# Altium PCB RockRTK.PcbDoc (part 5 of 8)
Units mm, origin at the board's own origin, x right, y up, seen from the top; angles counter-clockwise.
Board outline 128 x 72 mm, 6 copper layers (Top Layer, MidLayer1GND, MidLayer2SIG, MidLayer3PWR, MidLayer4GND, Bottom Layer), stack 1.538 mm thick; 400 components, 307 nets, 1795 pads, 1243 vias.
Unrouted connection lines stored in the file: 522.
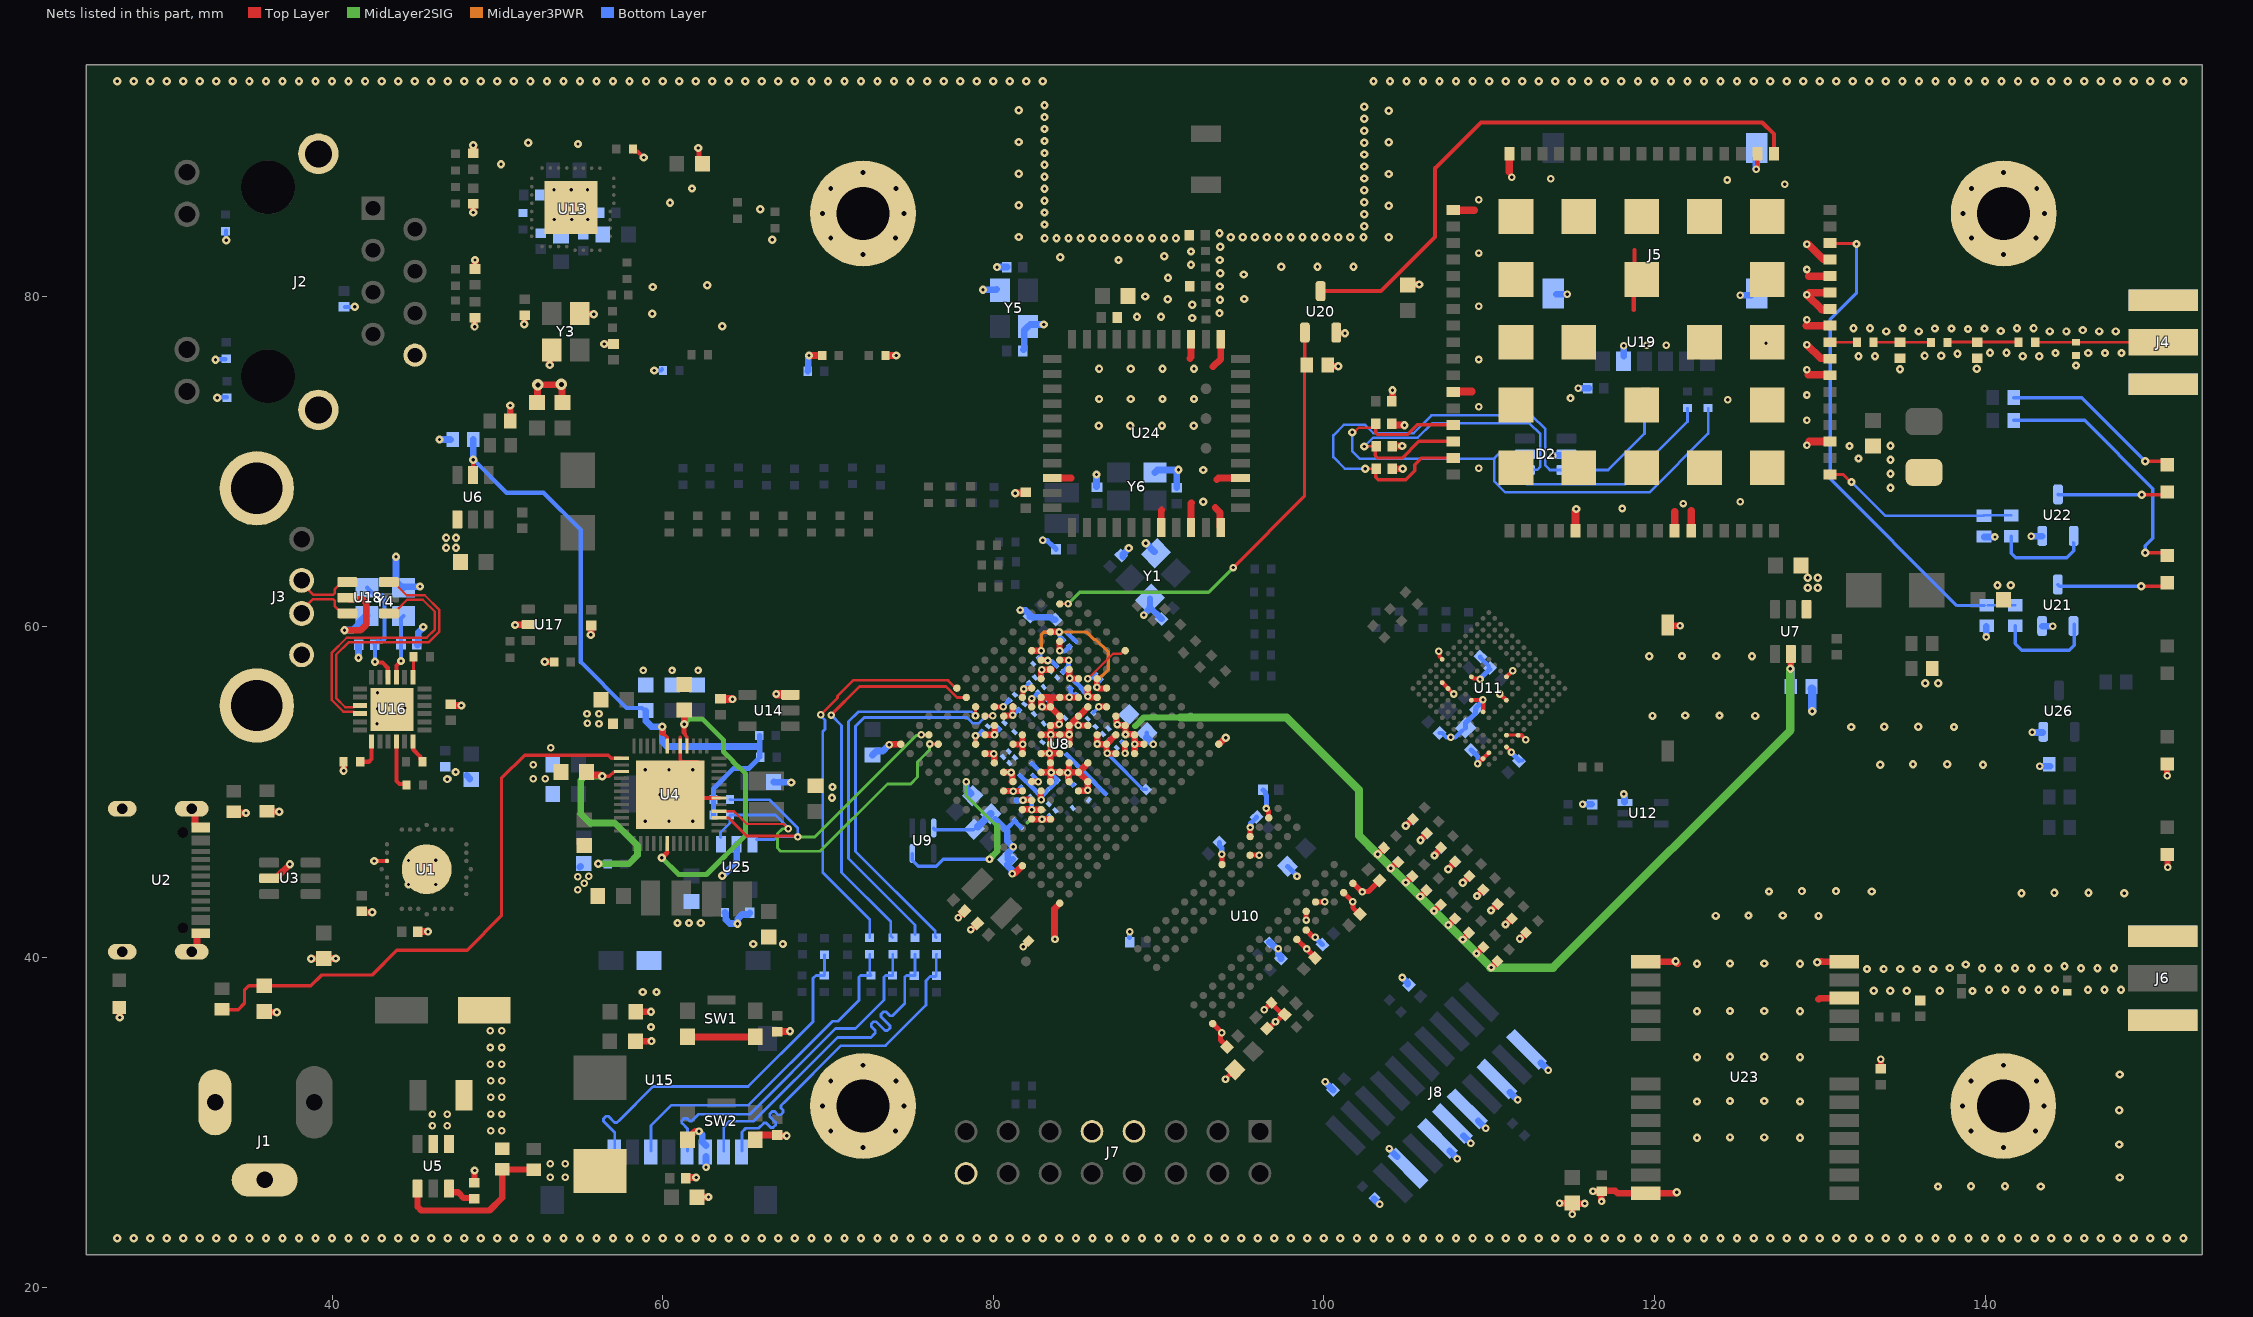
[diagram p8: the nets of this part, all layers, seen from the top]

## Via types
v1: diameter 0.5, hole 0.2, Top Layer to Bottom Layer, tented both sides, 532 vias
v2: diameter 0.457, hole 0.203, Top Layer to Bottom Layer, tented both sides, 414 vias
v3: diameter 0.5, hole 0.2, Top Layer to Bottom Layer, 233 vias
v4: diameter 0.7, hole 0.3, Top Layer to Bottom Layer, 32 vias
v5: diameter 0.457, hole 0.2, Top Layer to Bottom Layer, tented both sides, 30 vias
v6: diameter 0.7, hole 0.3, Top Layer to Bottom Layer, tented both sides, 2 vias

## Nets (pads, with @x,y where several pads share a name; then routed paths per layer and width w, separated by ;. In a path a pad name is that pad's centre, name@x,y a point inside that pad or via, vN(x,y) a via of type N, cw(c..) or ccw(c..) an arc to the next point about the centre after c; other vN are vias at no path point) (continued)
GND: C1.2 C2.2 C3.2 C4.2 C5.2 C6.2 C7.2 C8.2 C9.2 C10.2 C11.2 C12.2 C13.2 C14.2 C15.2 C16.2 C17.2 C18.2 C19.2 C20.2 C21.2 C22.2 C23.2 C25.2 C26.2 C27.2 C29.2 C30.2 C31.2 C33.2 C34.2 C35.2 C36.2 C37.2 C38.2 C39.2 C40.2 C41.2 C42.2 C43.2 C44.2 C45.2 C46.2 C47.2 C48.2 C49.2 C50.2 C51.2 C52.2 C53.2 C54.2 C55.2 C56.2 C57.2 C58.2 C59.2 C60.2 C61.2 C62.2 C63.2 C64.2 C65.2 C66.2 C67.2 C68.2 C69.2 C70.2 C71.2 C72.2 C73.2 C74.2 C75.2 C76.2 C77.2 C78.2 C79.2 C80.2 C81.2 C82.2 C83.2 C84.2 C85.2 C86.1 C87.1 C88.1 C89.1 C90.2 C91.2 C92.2 C93.2 C94.2 C95.2 C96.2 C97.2 C98.2 C99.2 C100.2 C101.2 C102.2 C103.2 C104.2 C105.2 C106.2 C107.2 C108.2 C109.2 C110.2 C111.2 C112.2 C113.2 C114.2 C115.2 C116.2 C117.2 C118.2 C119.2 C120.2 C121.2 C122.2 C123.2 C124.2 C125.1 C126.1 C127.2 C128.2 C129.2 C130.2 C131.2 C132.2 C133.2 C134.1 C135.1 C136.2 C137.2 C138.2 C139.2 C140.2 C141.2 C142.2 C143.2 C144.2 C145.2 C146.2 C147.2 C148.2 C149.2 C150.1 C151.1 C152.2 C153.2 C154.2 C155.2 C156.1 C157.2 C158.2 C159.2 C160.2 C161.2 C162.2 C163.2 C164.2 C165.2 D1.2 D2.2 D3.2 J1.2 J1.3 J2.8 J2.15 J2.16 J3.4 J3.5 J3.6 J4.G1 J4.G2 J4.G3 J4.G4 J5.C5 J5.S1 J5.S2 J5.S3 J6.G1 J6.G2 J6.G3 J6.G4 J7.07 J7.09 J7.16 J8.04 J8.08 J8.10 J8.12 J8.16 J8.20 LED1.2 LED4.2 LED5.2 MNH1.1 MNH2.1 MNH3.1 MNH4.1 R1.1 R2.1 R5.1 R6.1 R8.1 R10.1 R11.1 R15.1 R33.1 R34.1 R35.1 R36.1 R37.1 R38.1 R39.1 R40.1 R41.1 R42.1 R43.1 R44.1 R45.1 R46.1 R47.1 R48.1 R49.1 R51.2 R68.1 R69.1 R70.1 R76.1 R77.1 R78.1 R79.1 R80.1 R81.1 R92.2 R93.1 R100.2 R103.2 R104.1 R119.2 R120.1 R165.2 R168.1 SW1.3 SW1.4 SW2.3 SW2.4 SW3.2 U1.3 U1.29 U2.A1/B12 U2.B1/A12 U2.SH1 U2.SH2 U2.SH3 U2.SH4 U3.2 U4.30 U4.41 U4.49 U5.1 U6.1 U7.1 U8.A1 U8.A5 U8.A18 U8.E8 U8.F8 U8.G8 U8.G9 U8.G11 U8.G12 U8.H6 U8.H7 U8.H8 U8.H9 U8.H10 U8.H12 U8.J6 U8.J7 U8.J8 U8.J9 U8.J10 U8.J11 U8.K7 U8.K9 U8.K10 U8.K11 U8.L10 U8.L11 U8.L12 U8.L13 U8.M6 U8.M7 U8.M8 U8.M9 U8.M10 U8.M12 U8.M14 U8.N7 U8.N10 U8.N11 U8.N14 U8.V1 U8.V11 U9.3 U10.A9 U10.B1 U10.B9 U10.D1 U10.D8 U10.E2 U10.E8 U10.F9 U10.G1 U10.G9 U10.T9 U11.A6 U11.C4 U11.D4 U11.E7 U11.G5 U11.H10 U11.J5 U11.K8 U11.N1 U11.N2 U11.N5 U11.P4 U11.P6 U12.3 U13.33 U14.3 U15.6 U15.DS U16.25 U17.2 U18.2 U19.2 U19.17 U19.18 U19.29 U19.39 U19.45 U19.46 U19.54 U19.58 U19.59 U19.61 U19.62 U19.63 U19.64 U19.65 U19.69 U19.70 U19.71 U19.72 U19.73 U19.74 U19.75 U19.76 U19.77 U19.78 U19.79 U19.80 U19.81 U19.82 U19.83 U19.84 U19.85 U19.86 U19.87 U19.88 U20.2 U21.2 U22.2 U23.10 U23.12 U23.13 U23.24 U24.1 U24.3 U24.20 U24.29 U24.31 U24.33 U24.36 U25.2 U26.2 Y1.2 Y1.4 Y3.2 Y3.4 Y4.2 Y4.4 Y5.2 Y5.4 Y6.2 | length 248.5
  Top Layer w0.152: v2@85.8,57 85.89,57 87.259,58.368 87.73,58.368 87.905,58.544 U8.V11@87.986,58.544
  Top Layer w0.169: U10.T9@93.252,36.013 U10.T9@93.263,36.013 ; 93.621,35.655 93.825,35.451 v2(93.825,35.425) ; U10.E2@95.538,46.169 U10.E2@95.544,46.175
  Top Layer w0.178: U8.A5@81.734,45.533 U8.A5@81.763,45.533
  Top Layer w0.2: C124.2@63.55,55.6 C124.2@63.565,55.615 ; v5@64.21,55.615 v5(64.225,55.6)
  Top Layer w0.203: 61.057,53.305 61.057,51.953 61.176,51.834 U4.49@62.12,51.834 ; U11.N5@111.174,53.444 U11.P6@111.639,53.444
  Top Layer w0.254: v1(42.55,45.825) 43.175,45.825 ; R81.1@58.247,88.828 58.323,88.752 58.473,88.752 v1(58.85,88.375) ; U4.49@62.284,49.634 U4.30@63.42,49.634 ; U8.G11@81.757,52.328 U8.G11@81.763,52.321 ; v2(106.95,58.5) 106.989,58.461 106.989,58.203 107.157,58.035 U11.A6@107.157,58.025 ; U11.C4@107.164,56.611 U11.D4@107.525,56.25 ; U11.D4@107.511,56.257 107.511,56.247 107.825,55.933 v2@107.825,55.9 ; U11.G5@108.925,55.55 108.932,55.557 109.129,55.557 109.607,55.557 v2(109.625,55.575) 109.644,55.556 109.644,54.973 109.639,54.968 109.639,54.85 U11.J5@109.632,54.843 ; U11.E7@108.925,56.95 108.932,56.957 108.942,56.957 109.035,56.864 109.411,56.864 v2(109.45,56.825) ; v2@109.333,51.75 U11.N1@109.555,51.972 ; U11.N1@109.589,51.972 U11.N1@109.632,52.014 ; U11.N1@109.668,52.05 U11.N2@109.986,52.368 ; v2(110.65,55.925) 110.662,55.925 111.037,55.55 U11.K8@111.046,55.55 ; U11.P4@111.046,52.722 v2@111.318,52.45 ; U11.H10@111.046,56.964 111.055,56.964 111.416,57.325 v2(111.425,57.325) ; U11.P6@111.753,53.429 111.946,53.429 v2@112.15,53.225 ; 118.75,79.15 U19.85@118.75,80.23 ; U19.85@118.8,81.7 118.8,82.78 ; v2@126.075,87.65 126.075,87.655 126.225,87.805 U19.2@126.225,88.605
  Top Layer w0.305: v1@62.15,88.925 62.187,88.888 62.187,88.213 C127.2@62.4,88 ; U10.T9@93.263,36.013 93.621,35.655 ; v2@93.796,35.384 93.796,35.355 93.753,35.312 93.753,34.993 94.061,34.686 C92.2@94.061,34.536 ; v2(93.825,46.225) 93.833,46.217 93.833,45.639 U10.G1@93.852,45.62 ; v2@94.1,32.675 C91.2@94.627,33.202 ; U10.E2@95.525,46.181 v2@96.069,46.181 ; U10.D1@95.544,47.275 v2@95.544,47.819 ; v2(96.4,36.825) 96.775,37.2 R51.2@96.775,37.225 ; v2(96.525,49) 96.525,48.959 96.641,48.842 96.641,48.478 U10.B1@96.65,48.469 ; C93.2@96.625,35.7 96.664,35.7 97.064,36.1 97.116,36.1 97.396,36.38 C103.2@97.45,36.38 ; R51.2@96.821,37.221 C103.2@97.546,36.496 ; U10.G9@98.352,41.063 98.397,41.063 98.96,40.5 v2(98.975,40.5) 98.975,40.464 99.514,39.925 C100.2@99.514,39.914 ; v2(98.925,42.25) 98.928,42.253 98.928,42.737 U10.E8@98.966,42.775 ; U10.F9@98.928,41.648 99.346,41.229 99.446,41.229 v2(99.475,41.2) ; U10.D8@99.479,43.355 v2@100.045,43.355 ; U10.B9@101.202,43.913 101.202,43.898 v2(101.75,43.35) ; v2@101.75,43.325 101.753,43.322 101.753,43.001 C97.2@102.214,42.539 ; U10.A9@101.777,44.455 101.799,44.455 102.304,43.95 v2(102.325,43.95) 102.354,43.979 102.708,43.979 C95.2@103.364,44.636 ; U11.C4@107.157,56.611 U11.C4@107.164,56.611 ; U11.N1@109.555,51.972 U11.N1@109.589,51.972 ; U11.N1@109.65,52.05 U11.N1@109.668,52.05 ; v2@111.318,52.45 v2@111.325,52.45
  Top Layer w0.381: v2(77.89,42.391) C89.1@78.274,42.775 ; v2(78.65,41.675) 78.661,41.675 79.036,42.05 C88.1@79.049,42.05 ; U8.G12@81.19,52.875 v2(81.775,52.875) ; U8.G11@81.757,52.328 81.769,52.34 81.769,52.869 v2(81.775,52.875) ; U8.H12@81.763,53.453 81.769,53.447 81.769,52.881 v2(81.775,52.875) ; v2(81.815,40.641) R15.1@82.199,41.025 ; v2@81.819,49.519 U8.E8@82.269,49.519 ; v2@82.881,49.544 U8.F8@82.881,49.994 ; U8.M14@82.886,56.916 82.886,57.34 82.925,57.379 v2(82.925,57.4) 82.931,57.394 U8.N14@83.394,57.394 ; U8.G9@82.895,51.19 v2@83.46,51.19 ; U8.H10@82.895,52.321 82.908,52.335 83.364,52.335 83.379,52.35 v2(83.4,52.35) ; v2@82.906,55.249 U8.L13@82.906,55.616 ; U8.L13@82.925,55.65 83,55.725 83.4,55.725 ; U8.J11@82.97,53.479 82.957,53.466 82.908,53.466 U8.J11@82.895,53.453 v2@83.425,53.453 ; v2@83.009,55.112 U8.L12@83.434,55.112 ; 83.4,55.565 83.4,55.69 ; v2@83.425,53.5 83.459,53.466 84.013,53.466 U8.K10@84.026,53.453 84.037,53.464 84.589,53.464 v2(84.6,53.475) 84.596,53.479 84.596,54.014 U8.L10@84.592,54.018 ; 83.447,55.518 83.447,55.163 U8.L11@84.026,54.584 ; v2@83.45,51.225 83.472,51.203 U8.H8@84.013,51.203 ; U8.G8@83.46,50.624 83.474,50.637 83.474,51.128 83.5,51.154 v2(83.5,51.175) ; v2@83.46,51.215 U8.H9@83.46,51.756 U8.J10@83.46,52.887 83.468,52.894 v2@83.468,53.418 ; v2@83.474,53.501 83.474,54.005 U8.K11@83.46,54.018 83.474,54.032 83.911,54.032 83.979,54.1 v2(84,54.1) 84.015,54.115 84.015,54.49 U8.L11@84.025,54.5 ; v2@83.475,52.375 83.515,52.335 84.013,52.335 U8.J9@84.026,52.321 ; 83.475,55.7 83.477,55.702 84.013,55.702 U8.M12@84.026,55.715 ; U8.N14@83.556,57.406 U8.N14@83.56,57.41 ; U8.H8@83.975,51.2 83.985,51.19 84.579,51.19 85.162,51.19 85.448,51.476 85.459,51.476 U8.K7@85.717,51.733 ; U8.M12@84.007,55.715 U8.N11@85.157,55.715 ; U8.J9@84.025,52.298 U8.J9@84.027,52.3 ; v2@84.475,51.125 84.579,51.229 84.579,51.742 U8.J8@84.592,51.756 U8.J8@84.582,51.765 ; v2@84.475,51.172 84.579,51.068 84.579,50.637 U8.H7@84.592,50.624 ; U8.L10@84.582,54.018 84.61,54.018 84.69,54.098 84.702,54.098 84.879,54.275 ; U8.K9@84.592,52.887 84.605,52.9 84.605,53.38 v2@84.625,53.4 ; v2(85.15,54.025) 84.875,54.3 84.875,54.302 85.171,54.597 85.22,54.597 85.521,54.899 85.521,54.929 85.723,55.131 U8.N10@85.723,55.15 ; U8.H6@85.157,50.059 85.171,50.072 85.676,50.072 85.704,50.1 v2(85.725,50.1) 85.724,50.101 U8.J6@85.724,50.624 ; v2@85.157,54.018 U8.M9@85.723,54.018 ; U8.J7@85.171,51.178 U8.J6@85.711,50.637 ; U8.M8@86.289,53.453 86.294,53.447 86.294,52.906 86.313,52.887 U8.M7@86.854,52.887 ; U8.N7@87.417,53.45 U8.M7@86.854,52.887 ; U8.M6@87.42,52.321 86.949,52.321 86.921,52.35 v2(86.9,52.35) 86.9,52.371 86.854,52.416 U8.M7@86.854,52.887 ; U8.V1@93.687,52.907 v1@93.961,53.181 ; v1@105.064,48.044 R48.1@105.338,48.318 ; v1(105.85,47.075) 105.85,47.098 106.22,47.468 R44.1@106.238,47.468 ; v1(106.7,46.15) 106.7,46.182 107.084,46.566 107.084,46.597 R40.1@107.063,46.618 ; v1(107.525,45.325) 107.525,45.346 107.938,45.759 R36.1@107.938,45.768 ; v1@108.514,44.594 R39.1@108.788,44.868 ; v1@109.364,43.794 R35.1@109.638,44.068 ; v1@110.214,42.919 R38.1@110.488,43.193 ; v1@111.089,42.069 R34.1@111.363,42.343 ; v1@111.964,41.219 R37.1@112.238,41.493 ; v2@114.271,25.125 C148.2@114.824,25.125 ; v2@115.025,24.471 C148.2@115.025,25.024 ; C148.2@115.211,25.088 v2@115.763,25.088 ; v2@116.296,25.85 C147.2@116.849,25.85 ; v2@116.788,25.237 C147.2@116.788,25.789 ; SW3.2@120.836,60.038 120.848,60.05 v2(121.55,60.05) ; C146.2@133.712,33.261 v2@133.712,33.813 ; v2@151.013,50.987 LED4.2@151.013,51.539 ; v2@151.038,45.462 LED5.2@151.038,46.014
  Top Layer w0.406: v1(27.15,36.35) LED1.2@27.15,36.975 ; U2.SH2@31.559,40.327 31.583,40.327 31.834,40.578 31.834,41.355 31.956,41.477 U2.B1/A12@31.984,41.477 ; U2.SH1@31.875,48.9 31.858,48.9 31.709,48.751 31.709,47.974 31.806,47.877 U2.A1/B12@31.984,47.877 ; R1.1@34.175,48.725 v1(34.8,48.725) ; C18.2@36.025,36.675 v1(36.65,36.675) ; U3.2@36.141,44.75 36.233,44.842 36.667,44.842 v1(37.45,45.625) ; R2.1@36.175,48.8 v1(36.8,48.8) ; v1(38.75,39.9) C1.2@39.375,39.9 ; C1.2@39.6,39.925 v1(40.225,39.925) ; v1(40.7,51.275) R93.1@40.7,51.9 ; v1@40.725,59.775 41.712,59.775 42.075,60.138 42.075,61.42 41.837,61.658 41.017,61.658 U18.2@40.925,61.75 ; C3.2@41.8,42.725 v1(42.425,42.725) ; C2.2@45.175,41.55 v1(45.8,41.55) ; C133.2@47.272,55.223 v1@47.823,55.223 ; v1@48.548,85.052 C122.2@48.548,85.603 ; C121.2@48.552,88.573 v1@48.552,89.123 ; v1@48.623,78.152 C120.2@48.623,78.702 ; C119.2@48.652,81.622 v1@48.652,82.173 ; v1(50.775,73.375) 50.777,73.373 50.777,72.444 R8.1@50.779,72.442 ; v1(51.075,60.1) 51.085,60.11 51.862,60.11 U17.2@51.872,60.12 ; v1@51.623,78.303 C126.1@51.623,78.853 ; C30.2@52.397,73.557 52.423,73.583 52.423,74.598 52.462,74.637 53.862,74.637 v6(53.875,74.65) 53.911,74.614 53.911,73.592 C31.2@53.946,73.557 ; v1@52.877,57.877 R92.2@53.428,57.877 ; v1@53.172,75.827 Y3.4@53.172,76.378 ; Y3.2@55.273,78.898 v1@55.823,78.898 ; C132.2@55.648,60.053 55.661,60.039 55.661,59.511 v1(55.65,59.5) ; v1@56.477,77.103 C125.1@57.028,77.103 ; R81.1@58.2,88.9 58.247,88.853 R81.1@58.247,88.828 ; C26.2@58.45,36.725 58.475,36.7 v1(59.3,36.7) ; C27.2@58.575,34.925 v1(59.325,34.925) ; v5(60.569,57.348) v5@60.57,57.349 ; C17.2@61.3,56.5 C17.2@61.415,56.615 ; SW1.3@61.35,35 61.525,35.175 SW1.4@65.6,35.175 ; SW2.3@61.5,28.95 61.5,29 61.965,29.465 62.19,29.465 v2(62.2,29.475) ; C128.2@61.525,26.675 v1(62.025,26.675) ; v5@62.148,57.348 v5@62.147,57.349 ; C129.2@62.15,25.5 v1(62.775,25.5) ; U4.49@62.25,49.6 U4.49@62.284,49.634 ; SW2.4@65.6,28.95 65.6,29 65.847,29.247 66.622,29.247 C90.2@66.625,29.25 ; C90.2@66.875,29.2 v1(67.5,29.2) ; C23.2@67.025,35.5 67.035,35.51 67.685,35.51 v1(67.7,35.525) ; v1(68.85,76.4) R78.1@69.65,76.4 ; R76.1@73.475,76.4 v1(74.125,76.4) ; v2@73.675,52.85 73.704,52.879 74.401,52.879 U8.A18@74.409,52.887 ; v2(81.15,45.05) 81.16,45.06 81.278,45.06 81.743,45.525 U8.A5@81.743,45.533 ; v1@81.327,68.077 C154.2@81.877,68.077 ; U24.20@83.582,68.986 84.711,68.986 84.725,69 ; v2@83.7,41.1 83.7,42.933 84.026,43.259 U8.A1@84.026,43.27 ; U24.29@90.17,65.998 90.17,67.02 90.2,67.05 ; 91.9,76.225 91.97,76.295 U24.3@91.97,77.374 ; U24.31@91.97,65.998 91.97,67.47 92,67.5 ; 93.3,75.725 93.77,76.195 U24.1@93.77,77.374 ; 93.425,67.2 93.723,66.902 93.723,66.045 U24.33@93.77,65.998 ; 93.525,68.9 93.611,68.986 U24.36@94.958,68.986 ; R100.2@100.322,75.748 v1@100.873,75.748 ; U20.2@100.722,77.748 v1@101.273,77.748 ; C143.2@104.105,72.275 104.187,72.193 104.857,72.193 v1(104.875,72.175) ; C142.2@104.15,70.925 v1(104.75,70.925) ; C144.2@104.15,73.7 v1(104.15,74.3) ; C141.2@104.175,69.55 v1(104.775,69.55) ; C136.2@105.222,80.697 v1@105.773,80.697 ; C147.2@116.875,25.85 116.9,25.875 117.625,25.875 117.774,25.726 121.276,25.726 121.325,25.775 v1(121.35,25.775) ; U23.13@119.476,39.726 121.274,39.726 v1@121.4,39.6 ; 129.925,37.45 130.001,37.526 U23.10@131.476,37.526 ; v1@130.075,39.75 130.099,39.726 U23.12@131.476,39.726
  Top Layer w0.457: U19.29@107.87,74.225 108.95,74.225 ; U19.18@108.02,85.2 109.1,85.2 ; 111.225,87.525 U19.17@111.225,88.605 ; U19.39@115.225,65.945 v1@115.225,67.025 ; U19.45@121.225,65.87 121.225,66.95 ; U19.46@122.225,65.92 122.225,67 ; 129.2,78.2 U19.61@130.28,78.2 ; v2(129.225,77.05) 130.05,76.225 U19.59@130.355,76.225 ; v2(129.225,80.088) 130.138,79.175 U19.62@130.23,79.175 ; v2(129.225,83.125) 129.305,83.125 130.205,82.225 ; 129.3,75.225 U19.58@130.38,75.225 ; 129.325,81.2 U19.64@130.405,81.2 ; 129.375,71.2 U19.54@130.455,71.2 ; v2@129.375,80.2 U19.63@130.455,80.2
  Top Layer w0.5: C124.2@63.565,55.615 v5@64.21,55.615 ; v5@66.89,55.91 U14.3@67.535,55.91
  Bottom Layer w0.2: C52.2@83.273,50.127 C52.2@83.275,50.125 ; C165.2@100.561,31.961 C165.2@100.561,31.964
  Bottom Layer w0.203: U9.3@76.4,47.82 76.4,47.771 76.461,47.709 78.805,47.709 C40.2@78.823,47.727 ; C50.2@80.1,48.35 C50.2@80.125,48.35 ; C39.2@80.873,45.927 C39.2@80.873,46.348 ; v2@81.726,52.826 v2(81.775,52.875) v2@81.762,52.888 ; v2@82.866,57.325 v2@82.925,57.325 ; v2@82.9,57.4 v2(82.925,57.4) ; v2@82.975,49.45 83.001,49.476 v2@83.017,49.476 ; C79.2@85.009,59.076 C79.2@85.044,59.041 ; v2@86.925,52.325 86.925,52.305 87.184,52.046 87.184,52.026 89.057,50.154 R120.1@89.254,50.154
  Bottom Layer w0.254: v1@32.983,76.172 R69.1@33.547,76.172 ; v1@33.083,73.872 R70.1@33.647,73.872 ; v1@33.578,83.408 R68.1@33.578,83.972 ; C123.2@40.778,79.328 v1@41.342,79.328 ; v1(59.5,75.5) 59.902,75.5 59.953,75.551 R79.1@59.953,75.572 ; C111.2@106.989,53.561 107.164,53.561 107.425,53.3 107.95,53.3 C110.2@108.375,53.725 ; C105.2@109.204,54.996 C105.2@109.204,55.099 ; v2(109.45,56.825) v2@109.45,56.852 ; C109.2@109.464,58.189 109.464,58.137 110,57.602 C106.2@110,57.5 ; v2@109.575,55.5 109.586,55.489 v2@109.586,55.481 ; C106.2@109.998,57.4 C106.2@110.075,57.4 ; v2@111.35,52.364 v2(111.35,52.4) ; C108.2@111.814,51.9 C108.2@112,51.9
  Bottom Layer w0.279: 80.8,47.825 80.867,47.825 C83.2@81.316,48.274 ; C83.2@81.35,48.175 81.354,48.175 81.654,47.875 C84.2@81.675,47.875 ; C82.2@81.634,50.976 81.994,50.616 82.044,50.616 C65.2@82.059,50.601 82.059,50.591 82.55,50.1 C81.2@82.55,50.075 ; C43.2@82.359,51.701 82.8,51.26 C44.2@82.8,51.25 ; C81.2@82.643,49.974 v2@82.916,49.7 ; v2@82.926,49.743 C52.2@83.2,50.016 ; 83.476,50.268 83.75,50.541 ; v2@83.559,51.05 83.832,50.776 ; C61.2@84.437,52.263 C35.2@86.153,50.547 ; C67.2@84.555,59.541 C79.2@84.93,59.166 ; v2(84.6,55.725) 84.6,55.773 84.681,55.854 84.681,56.259 C78.2@84.666,56.274 ; v2@84.625,55.675 84.625,55.702 84.811,55.888 85.027,55.888 C77.2@85.041,55.874 ; C36.2@84.849,50.434 84.482,50.8 v2@84.482,51.168 ; v2(85.725,56.85) 85.759,56.884 85.903,56.884 86.128,57.109 C62.2@86.149,57.109 ; C35.2@86.145,50.539 C38.2@86.788,49.896 ; C70.2@89.298,53.277 C70.2@89.298,53.577 ; v2@84.481,51.169 v2@84.482,51.168
  Bottom Layer w0.305: v2@82.975,65.295 82.975,65.291 83.07,65.196 83.274,65.196 83.627,64.843 83.657,64.843 83.795,64.705 C157.2@83.795,64.675 ; v2(84,54.1) v2@84.029,54.071 ; v2@85.063,54.071 85.109,54.025 v2(85.15,54.025) ; v2@85.696,50.129 v2(85.725,50.1) ; v2(86.3,52.9) v2@86.3,52.941 ; C96.2@88.25,41.188 v2(88.25,41.55) ; C104.2@93.689,46.939 93.689,46.745 93.825,46.609 v2(93.825,46.225) ; v2@95.575,47.9 95.579,47.904 95.579,48.104 95.936,48.461 C98.2@95.936,48.489 ; C99.2@96.32,50.125 96.458,49.987 96.458,49.846 96.525,49.779 v2(96.525,49) ; C102.2@97.802,45.502 98.354,44.95 v2@98.375,44.95 ; v2(99.475,41.2) v2(99.475,41.2) 99.909,40.764 C101.2@99.911,40.764 ; C110.2@108.573,53.877 108.573,54.166 109.183,54.776 109.183,54.975 C105.2@109.204,54.996 ; C107.2@108.911,52.536 109.325,52.121 v2@109.325,51.8 ; C105.2@109.204,55.099 v2@109.586,55.481 ; v2@109.45,56.852 C106.2@109.998,57.4 ; v2@111.35,52.364 C108.2@111.814,51.9
  Bottom Layer w0.381: C85.2@81.412,49.477 81.42,49.485 81.79,49.485 v2@81.8,49.475 ; v2(89.1,60.7) 89.1,60.719 89.483,61.102 Y1.2@89.483,61.681 ; Y1.2@89.45,61.196 C86.1@90.186,60.461 ; v1(104.96,47.949) 104.98,47.949 105.345,48.314 105.361,48.314 R43.1@105.4,48.275 ; v1@105.9,47.1 105.883,47.117 105.883,47.12 106.246,47.484 R42.1@106.246,47.496 ; v1(106.7,46.15) 106.7,46.182 107.096,46.579 R47.1@107.096,46.621 ; v1(107.525,45.325) 107.525,45.357 107.875,45.707 R46.1@107.875,45.775 ; v1@108.475,44.575 R45.1@108.821,44.921 ; v1@109.25,43.725 109.293,43.725 109.64,44.071 R41.1@109.646,44.071 ; v1@110.15,42.875 110.496,43.221 R33.1@110.521,43.221
  Bottom Layer w0.4: v2@100.05,32.475 C165.2@100.561,31.964
  Bottom Layer w0.406: v1(40.75,59.775) 40.768,59.793 41.268,59.793 41.628,60.153 41.628,60.253 42.025,60.65 Y4.2@42.125,60.65 ; v1(41.6,58.125) C135.1@41.6,58.93 ; v1(43.875,64.225) 43.875,62.747 44.272,62.35 Y4.4@44.325,62.35 44.382,62.407 45.307,62.407 v1(45.325,62.425) ; C134.1@45.168,58.882 45.217,58.931 45.217,59.641 45.525,59.95 v1(45.525,59.975) ; v1(46.5,71.325) 47.15,71.325 R6.1@47.175,71.3 ; v1@46.975,50.778 v1(46.975,50.775) 46.993,50.793 v1@47.043,50.793 ; v1@47.45,51.2 v1@47.5,51.2 ; C131.2@48.153,50.997 48.33,50.82 C131.2@48.33,50.775 ; C7.2@54.985,45.454 C7.2@55.025,45.494 ; v2(62.2,29.475) 62.2,29.461 62.403,29.258 62.403,28.822 62.619,28.606 U15.6@62.625,28.606 ; v2(62.625,27.3) U15.6@62.625,27.944 ; v1@63.7,45 64.475,45.775 U25.2@64.475,46.825 ; R119.2@63.775,42.7 63.822,42.653 63.822,42.281 64.06,42.043 64.518,42.043 v1@64.543,42.018 ; v1(64.525,42.025) 64.543,42.043 64.543,42.316 64.81,42.583 65.183,42.583 C160.2@65.27,42.67 ; C14.2@66.725,50.6 66.737,50.588 67.762,50.588 v1(67.775,50.575) ; R77.1@68.775,75.45 68.81,75.485 68.81,76.335 68.85,76.375 v1(68.85,76.4) ; C51.2@72.7,52.225 72.947,52.472 73.322,52.472 73.675,52.825 v2@73.7,52.825 ; v1(79.375,80.375) 80.18,80.375 Y5.4@80.215,80.41 ; C50.2@80.125,48.35 80.802,47.673 ; v1(80.225,81.75) C150.1@80.855,81.75 ; 80.85,47.6 80.85,47.025 v2(81.2,46.675) 81.19,46.665 81.19,46.593 80.873,46.276 C39.2@80.873,45.927 ; v2(81.15,45.05) 81.14,45.06 81.14,45.275 80.855,45.56 80.855,45.605 C39.2@81.175,45.925 ; v5(81.625,61) 81.635,60.99 81.958,60.99 C162.2@82.39,60.559 ; C151.1@81.825,76.75 81.83,76.75 81.872,76.792 81.872,77.922 Y5.2@82.1,78.15 ; C162.2@82.226,60.593 C162.2@82.205,60.615 82.327,60.615 82.372,60.57 83.484,60.57 83.636,60.418 C163.2@83.759,60.418 ; Y5.2@82.245,78.275 v1(83.05,78.275) ; C155.2@86.25,68.455 v1(86.25,69.2) ; C87.1@87.847,64.239 87.847,64.372 88.2,64.725 v1(88.2,64.75) ; v1(89.234,65.049) Y1.4@89.761,64.522 ; Y6.2@89.777,69.325 89.93,69.478 91.178,69.478 v1@91.2,69.5 ; C156.1@91.1,68.405 91.1,69.35 v1@91.2,69.45 ; R49.1@96.704,40.904 96.744,40.904 97.125,40.522 97.223,40.522 v2@97.233,40.512 ; v2@97.247,40.499 97.256,40.489 97.256,40.195 97.414,40.037 C94.2@97.414,39.914 ; R168.1@103.025,25.375 103.045,25.375 103.368,25.051 v2(103.382,25.051) ; v2(103.95,28.425) 103.95,28.411 104.433,27.928 J8.04@104.433,27.926 ; v2(104.75,38.775) 104.75,38.761 105.083,38.428 C164.2@105.083,38.376 ; J8.08@107.617,28.274 v2(108.073,27.819) ; J8.10@108.442,29.199 v2(108.898,28.744) ; J8.12@109.342,30.099 v2(109.798,29.644) ; J8.16@111.267,31.824 v2(111.723,31.369) ; J8.20@113.117,33.624 v2(113.573,33.169) ; v2(113.85,70.35) 113.86,70.36 114.921,70.36 D2.2@114.971,70.41 ; J5.S1@114.081,80.1 v2(114.725,80.1) ; v2(115.4,74.425) C145.2@116.044,74.425 ; v2(115.65,49.25) C112.2@116.194,49.25 ; v2(118.15,49.875) 118.15,49.861 118.185,49.827 118.185,49.396 U12.3@118.2,49.381 ; J5.C5@118.15,76.356 v2(118.15,77) ; v2(125.2,80.05) J5.S2@125.844,80.05 ; v2(126.15,87.675) J5.S3@126.15,88.319 ; R103.2@139.956,65.425 v2(140.6,65.425) ; v2(140.075,59.375) R104.1@140.075,60.019 ; v2(142.8,65.475) U22.2@143.444,65.475 ; v2(142.85,53.6) U26.2@143.494,53.6 ; v2(143.3,51.55) R165.2@143.944,51.55 ; U21.2@143.456,60.025 v2(144.1,60.025)
  Bottom Layer w0.457: C40.2@79.071,47.9 C50.2@79.848,48.677 ; C70.2@89.298,53.277 v5@89.65,52.925
  Bottom Layer w0.508: R10.1@129.525,56.25 129.55,56.225 v1(129.55,54.875)
  other v1: 137.155,26.125 143.375,26.125 139.145,26.15 141.21,26.15 148.15,26.68 148.125,28.67 122.58,29.075 128.8,29.075 124.57,29.1 126.635,29.1 148.125,30.735 122.58,31.275 128.8,31.275 124.57,31.3 126.635,31.3 148.15,32.9 122.58,33.95 128.8,33.95 124.57,33.975 126.635,33.975 59.3,35.775 122.58,36.725 128.8,36.725 124.57,36.75 126.635,36.75 58.8,37.9 59.625,37.9 133.263,37.97 134.263,37.97 135.263,37.97 137.263,37.97 139.24,37.96 140.238,38.026 141.238,38.026 142.238,38.026 143.238,38.026 144.238,38.026 146.226,38.026 147.226,38.026 148.226,38.026 132.864,39.282 133.864,39.282 134.864,39.282 135.864,39.282 136.864,39.282 137.862,39.349 139.816,39.338 140.816,39.338 141.816,39.338 142.816,39.338 143.816,39.338 145.804,39.338 146.804,39.338 147.804,39.338 144.81,39.448 138.84,39.555 122.58,39.6 128.8,39.6 124.57,39.625 126.635,39.625 129.855,39.7 121.28,39.75 65.475,40.8 67.275,40.8 111.86,41.124 110.985,41.974 60.9,42.075 61.6,42.075 62.3,42.075 123.705,42.5 129.925,42.5 125.695,42.525 127.76,42.525 110.11,42.824 109.26,43.699 142.205,43.875 148.425,43.875 144.195,43.9 146.26,43.9 126.93,43.975 133.15,43.975 128.92,44 130.985,44 44.625,44.4 46.275,44.4 108.41,44.499 63.6,44.925 44.625,45.85 46.275,45.875 58.95,48.225 60.387,48.225 61.825,48.225 70.25,49.65 59.85,49.825 70.275,50.3 47.475,51.2 58.95,51.35 60.387,51.35 61.825,51.35 133.655,51.65 139.875,51.65 135.645,51.675 137.71,51.675 94.065,53.276 131.905,53.925 138.125,53.925 133.895,53.95 135.96,53.95 42.725,54.125 119.88,54.6 126.1,54.6 121.87,54.625 123.935,54.625 42.75,55.025 44.4,55.075 47.825,55.225 42.75,56 136.375,56.575 137.175,56.575 52.875,57.875 119.68,58.2 125.9,58.2 121.67,58.225 123.735,58.225 129.275,62.35 129.875,62.35 140.75,62.5 141.55,62.5 129.275,62.95 129.875,62.95 46.9,64.775 47.5,64.775 46.9,65.375 47.5,65.375 115.275,67.11 92.7,67.56 81.325,68.075 134.275,68.4 134.275,69.25 92.7,69.475 91.211,69.496 134.275,70.1 132.35,70.175 131.8,70.925 134.275,70.95 86.38,72.15 88.295,72.15 90.21,72.15 92.125,72.15 86.405,73.775 88.32,73.775 90.235,73.775 92.15,73.775 114.925,73.825 33.055,73.845 134.85,75.575 86.405,75.6 88.32,75.6 90.235,75.6 92.15,75.6 139.5,75.6 100.875,75.75 145.5,75.8 53.175,75.825 32.955,76.145 132.345,76.364 133.345,76.364 142.281,76.364 143.281,76.364 136.344,76.385 137.344,76.385 138.338,76.5 144.263,76.549 146.251,76.549 147.251,76.549 148.251,76.549 140.302,76.569 141.302,76.569 56.475,77.1 101.275,77.75 134.022,77.861 135.982,77.861 143.921,77.861 144.921,77.861 146.915,77.861 147.915,77.861 140.952,77.881 145.918,77.938 138.965,78.002 136.966,78.041 137.966,78.041 139.964,78.037 132.04,78.046 133.04,78.046 135.002,78.061 141.938,78.046 142.938,78.046 48.625,78.15 63.6,78.175 51.625,78.3 92.034,78.673 88.7,78.75 90.15,78.75 55.825,78.9 59.375,78.925 93.688,78.967 41.37,79.355 92.034,79.478 93.716,79.771 90.55,79.8 95.178,79.825 89.2,79.975 59.4,80.55 93.711,80.576 62.7,80.65 105.775,80.7 90.575,81.1 95.153,81.3 93.731,81.38 97.425,81.775 99.612,81.775 101.8,81.775 91.964,81.888 48.65,82.175 87.578,82.175 93.7,82.184 84.053,82.35 90.353,82.4 91.964,82.693 93.727,82.989 33.605,83.38 66.625,83.4 83.107,83.5 83.829,83.5 84.551,83.5 85.274,83.5 85.996,83.5 86.718,83.5 87.44,83.5 88.162,83.5 88.884,83.5 89.606,83.5 90.328,83.5 91.05,83.5 94.375,83.55 95.097,83.55 95.819,83.55 96.541,83.55 97.263,83.55 97.985,83.55 98.707,83.55 99.429,83.55 100.151,83.55 100.874,83.55 101.596,83.55 102.4,83.55 103.925,83.55 81.55,83.575 93.686,83.793 102.45,84.225 83.1,84.325 53.45,84.625 54.5,84.625 55.475,84.625 102.45,84.947 48.55,85.05 83.1,85.047 65.9,85.25 103.925,85.465 81.55,85.49 60.45,85.65 102.45,85.669 83.1,85.769 102.45,86.391 53.425,86.425 54.475,86.425 55.45,86.425 83.1,86.491 61.775,86.5 102.45,87.113 83.1,87.213 103.925,87.38 81.55,87.405 102.45,87.835 83.1,87.935 50.225,87.975 102.45,88.557 83.1,88.657 62.15,88.95 48.55,89.125 54.875,89.2 51.875,89.275 102.45,89.279 103.925,89.295 81.55,89.32 83.1,89.379 102.45,90.001 83.1,90.101 102.45,90.724 83.1,90.824 103.925,91.21 81.55,91.235 102.45,91.446 83.1,91.546
  other v2: 115.037,24.459 115.775,25.1 114.259,25.113 116.8,25.225 116.284,25.838 49.592,29.5 50.275,29.5 49.592,30.513 50.275,30.513 49.592,31.525 50.275,31.525 100.075,32.475 49.592,32.538 50.275,32.538 94.05,32.625 49.575,33.525 50.258,33.525 133.7,33.825 49.575,34.538 50.258,34.538 49.575,35.55 50.258,35.55 97.075,36.1 97.247,40.512 83.738,41.094 100.05,43.35 54.875,44.075 55.25,44.475 54.875,44.875 55.525,44.9 98.375,44.9 151.05,45.45 96.1,46.175 95.55,47.85 81.8,49.5 82.9,49.525 151.025,50.975 84.501,51.166 109.3,51.7 73.7,52.85 112.225,53.15 107.675,53.3 83.475,53.45 82.95,55.15 107.85,55.925 83,65.225 118.05,67.144 121.75,67.444 125.2,67.544 109.375,69.575 129.225,70.975 129.225,72.494 109.375,73.3 124.425,73.719 129.225,74.013 129.225,75.531 109.375,76.159 119.525,77.025 120.725,77.025 126.75,77.15 129.225,78.569 109.375,79.379 129.225,81.606 109.375,82.599 109.375,85.819 127.875,86.769 124.4,87.019 113.725,87.094 111.375,87.194
  other v3: 27,23 28,23 29,23 30,23 31,23 32,23 33,23 34,23 35,23 36,23 37,23 38,23 39,23 40,23 41,23 42,23 43,23 44,23 45,23 46,23 47,23 48,23 49,23 50,23 51,23 52,23 53,23 54,23 55,23 56,23 57,23 58,23 59,23 60,23 61,23 62,23 63,23 64,23 65,23 66,23 67,23 68,23 69,23 70,23 71,23 72,23 73,23 74,23 75,23 76,23 77,23 78,23 79,23 80,23 81,23 82,23 83,23 84,23 85,23 86,23 87,23 88,23 89,23 90,23 91,23 92,23 93,23 94,23 95,23 96,23 97,23 98,23 99,23 100,23 101,23 102,23 103,23 104,23 105,23 106,23 107,23 108,23 109,23 110,23 111,23 112,23 113,23 114,23 115,23 116,23 117,23 118,23 119,23 120,23 121,23 122,23 123,23 124,23 125,23 126,23 127,23 128,23 129,23 130,23 131,23 132,23 133,23 134,23 135,23 136,23 137,23 138,23 139,23 140,23 141,23 142,23 143,23 144,23 145,23 146,23 147,23 148,23 149,23 150,23 151,23 152,23 27,93 28,93 29,93 30,93 31,93 32,93 33,93 34,93 35,93 36,93 37,93 38,93 39,93 40,93 41,93 42,93 43,93 44,93 45,93 46,93 47,93 48,93 49,93 50,93 51,93 52,93 53,93 54,93 55,93 56,93 57,93 58,93 59,93 60,93 61,93 62,93 63,93 64,93 65,93 66,93 67,93 68,93 69,93 70,93 71,93 72,93 73,93 74,93 75,93 76,93 77,93 78,93 79,93 80,93 81,93 82,93 83,93 103,93 104,93 105,93 106,93 107,93 108,93 109,93 110,93 111,93 112,93 113,93 114,93 115,93 116,93 117,93 118,93 119,93 120,93 121,93 122,93 123,93 124,93 125,93 126,93 127,93 128,93 129,93 130,93 131,93 132,93 133,93 134,93 135,93 136,93 137,93 138,93 139,93 140,93 141,93 142,93 143,93 144,93 145,93 146,93 147,93 148,93 149,93 150,93 151,93 152,93
  other v4: 72.127,28.5 141.104,28.5 70.17,29.5 74.084,29.5 139.147,29.5 143.061,29.5 69.661,31 74.593,31 138.638,31 143.57,31 70.17,32.5 74.127,32.5 139.147,32.5 143.104,32.5 72.127,33.466 141.104,33.466 72.127,82.5 141.127,82.5 70.17,83.5 74.084,83.5 139.17,83.5 143.084,83.5 69.661,85 74.593,85 138.661,85 143.593,85 70.17,86.5 74.127,86.5 139.17,86.5 143.127,86.5 72.127,87.466 141.127,87.466
  other v5: 52.175,50.8 52.9,50.8 52.175,51.65 53.225,52.675 89.675,52.875 56.15,54.125 55.45,54.15 55.425,54.725 56.15,54.725 66.875,55.925 58.825,57.35 62.144,57.348
  other v6: 52.45,74.625
GP_USB_N: J3.2 U18.1 | length 3.7
  Top Layer w0.146: J3.2@38.1,62.8 38.1,62.683 38.846,61.937 39.639,61.937 40.072,61.937 40.158,62.022 40.158,62.243 40.615,62.7 U18.1@40.925,62.7
GP_USB_P: J3.3 U18.3 | length 3.8
  Top Layer w0.146: J3.3@38.1,60.8 38.1,60.917 38.846,61.663 39.526,61.663 40.072,61.663 40.158,61.578 40.158,61.257 40.615,60.8 U18.3@40.925,60.8
HUB_BUSJ: R91.2 U16.18 | length 1.4
  Top Layer w0.254: U16.18@44.89,53.038 44.89,52.585 45.352,52.123 45.352,51.948 R91.2@45.438,51.862
HUB_OVCJ: R90.2 U16.1 | length 1.3
  Top Layer w0.203: U16.1@44.89,56.938 44.925,56.972 R90.2@44.925,58.175
HUB_REXT: R93.2 U16.13 | length 1.8
  Top Layer w0.254: R93.2@41.7,51.825 42.225,51.825 42.39,51.99 U16.13@42.39,53.038
HUB_RSTJ: R89.1 U16.16 | length 3.1
  Top Layer w0.254: U16.16@43.89,53.038 43.89,50.66 44.075,50.475 44.45,50.475 R89.1@44.5,50.425
HUB_USB2_N: U16.9 U18.6 | length 16.2
  Top Layer w0.146: U16.9@41.69,55.238 41.415,55.238 41.302,55.124 40.801,55.124 40.25,55.675 40.25,58.3 41,59.05 45.836,59.05 46.493,59.707 46.493,61.009 45.604,61.898 44.512,61.898 43.967,62.444 43.967,62.478 43.745,62.7 U18.6@43.435,62.7
HUB_USB2_P: U16.10 U18.4 | length 16.3
  Top Layer w0.146: U16.10@41.69,54.738 41.415,54.738 41.302,54.851 40.687,54.851 40.057,55.482 39.977,55.562 39.977,58.413 40.887,59.323 45.723,59.323 46.22,59.82 46.22,60.896 45.491,61.625 44.545,61.625 43.967,61.046 43.967,61.022 43.745,60.8 U18.4@43.435,60.8
HUB_XIN: C135.2 U16.4 Y4.3 | length 7.1
  Top Layer w0.254: v1(42.6,57.875) 42.647,57.828 43.047,57.828 43.367,57.508 43.367,56.961 U16.4@43.39,56.938
  Bottom Layer w0.254: Y4.3@42.125,62.35 42.56,61.915 43.02,61.915 43.169,61.766 43.169,59.242 43.02,59.093 42.743,59.093 42.58,58.93 C135.2@42.58,58.9 42.59,58.89 42.59,57.885 v1(42.6,57.875)
HUB_XOUT: C134.2 U16.3 Y4.1 | length 3.9
  Top Layer w0.254: U16.3@43.89,56.938 43.89,57.64 v1(44.175,57.925)
  Bottom Layer w0.254: v1(44.175,57.925) 44.172,57.927 44.172,58.922 C134.2@44.17,58.925 44.17,60.495 Y4.1@44.325,60.65
I2C0_SCL: R160.1 U4.28 U8.C16 U25.1 | length 25
  Top Layer w0.146: U4.28@63.42,48.834 64.316,48.834 65.089,48.061 67.314,48.061 v2(67.6,47.775)
  Top Layer w0.169: v2@76.155,52.895 U8.C16@76.695,52.895
  MidLayer2SIG w0.169: v2(67.6,47.775) 67.25,47.775 66.95,47.475 66.95,46.6 67.14,46.41 69.525,46.41 73.6,50.485 75.007,50.485 75.425,50.902 75.425,51.8 76.15,52.525 v2(76.15,52.9)
  Bottom Layer w0.169: U25.1@63.5,47.25 63.5,47.55 64.075,48.125 R160.1@64.075,48.6 66.825,48.6 67.6,47.825 v2(67.6,47.775)
I2C0_SDA: R161.1 U4.27 U8.C17 U25.3 | length 23.9
  Top Layer w0.169: U4.27@63.42,48.434 63.991,48.434 65.09,47.335 67.932,47.335 67.937,47.33 68.12,47.33 v2(68.175,47.275) ; v2@75.655,53.445 U8.C17@76.195,53.445
  MidLayer2SIG w0.169: v2(68.175,47.275) 69.2,47.275 75.341,53.416 75.616,53.416 v2(75.65,53.45)
  Bottom Layer w0.169: R161.1@64.075,49.55 64.1,49.525 66.473,49.525 68.175,47.823 v2(68.175,47.275) ; U25.3@65.675,47.125 66.776,47.125 66.941,47.29 68.16,47.29 v2(68.175,47.275) ; v2@68.25,47.2 v2(68.175,47.275)
INPUT_DC_BOOT: C24.1 U5.6 | length 1.6
  Top Layer w0.381: C24.1@48.6,25.4 48.572,25.428 47.972,25.428 47.625,25.775 ; 47.625,25.775 47.375,25.775 47.625,25.775
INPUT_DC_FB: R4.1 R5.2 U5.4 | length 10.2
  Top Layer w0.381: U5.4@45.175,26 45.175,24.898 45.398,24.675 49.525,24.675 50.3,25.45 R5.2@50.3,27.175 ; R5.2@50.312,27.163 R4.1@52.188,27.163
INPUT_DC_SW: C24.2 L4.1 U5.2 | length 0.8
  Top Layer w0.381: C24.2@48.6,26.36 48.613,26.373 48.613,27.088 v1(48.625,27.1)
  other v2: 53.2,26.7 54.1,26.7 53.2,27.5 54.1,27.5 46.075,29.8 46.975,29.8 46.075,30.5 46.975,30.5
LDO_1V8: C17.1 C62.1 C63.1 C64.1 C65.1 C66.1 C67.1 C81.1 U4.18 U4.40 U8.D8 U8.D10 U8.E7 U8.E9 U8.H15 U8.N16 U8.R10 U8.R11 U8.R16 | length 36.1
  Top Layer w0.203: 60.269,46.324 U4.18@60.27,46.884 U4.18@60.27,46.884 ; 61.3,53.6 61.371,53.529 61.371,53.427 61.469,53.33 61.469,52.786 U4.40@61.47,52.784
  Top Layer w0.303: 61.3,53.6 v1(61.3,54.1)
  Top Layer w0.305: v1(59.95,46.025) 59.97,46.025 60.269,46.324 ; U8.H15@80.066,55.15 v2(80.6,55.15) ; U8.D10@80.632,50.059 U8.D10@80.636,50.054 ; U8.E9@81.759,50.054 U8.E9@81.763,50.059 ; U8.E7@82.934,48.926 U8.E7@82.962,48.954
  Top Layer w0.381: U8.D10@80.636,50.054 v2@81.371,50.054 ; v2@81.379,50.054 U8.E9@81.759,50.054 ; U8.D8@81.861,48.954 v2@82.296,48.954 ; v2@82.326,48.926 U8.E7@82.934,48.926 ; U8.N16@82.406,58.531 82.41,58.535 82.885,58.535 v2(82.9,58.55) ; U8.R16@83.469,59.731 83.51,59.69 83.985,59.69 v2(84,59.675) ; U8.R11@86.289,56.847 86.282,56.84 86.282,56.332 v2(86.275,56.325) 86.296,56.325 86.369,56.251 U8.R10@86.833,56.251
  Top Layer w0.406: v1(61.3,54.1) C17.1@61.3,54.95
  MidLayer2SIG w0.305: v1(59.95,46.025) 60.975,45 62.65,45 65,47.35 65,51.125 64.608,51.517 64.565,51.517 64.267,51.815 64.267,51.858 63.675,52.45 63.675,53.15 62.4,54.425 61.625,54.425 v1(61.3,54.1)
  MidLayer3PWR w0.203: v2(82.9,58.55) 82.9,59.5 83.05,59.65 v2@84,59.65 ; v2(84,59.675) 85.653,59.675 86.111,59.218 86.204,59.218 86.95,58.472 86.95,57.386 86.275,56.711 v2(86.275,56.325)
  Bottom Layer w0.203: C66.1@82.722,58.047 82.889,58.213 82.889,58.539 v2(82.9,58.55)
  Bottom Layer w0.279: v2@80.675,55.175 80.653,55.197 80.653,55.214 80.975,55.536 C63.1@80.975,55.547 ; v2(81.2,50.05) 81.234,50.084 81.492,50.084 C65.1@81.688,50.281 ; v2@82.275,48.95 82.325,49 C81.1@82.325,49.619 ; v2@83.975,59.675 84.034,59.616 84.034,59.412 84.219,59.227 C67.1@84.219,59.206 ; v2@86.325,56.35 86.309,56.366 86.309,56.578 86.484,56.753 C62.1@86.484,56.774
  Bottom Layer w0.305: v2@82.35,48.9 82.363,48.913 83.02,48.913 C64.1@83.024,48.916
  other v2: 82.325,48.925
LDO_1V8_RTC: C19.1 C44.1 C45.1 C46.1 C47.1 C48.1 C49.1 C50.1 R13.2 U4.3 U8.D7 U8.E6 U8.E14 U8.F9 U8.K13 U8.N6 U8.P9 U8.P14 U9.5 | length 33.5
  Top Layer w0.203: v1(56.35,50.95) 56.775,50.95 57.059,51.234 U4.3@57.52,51.234 ; U8.D7@82.375,48.325 U8.D7@82.406,48.356
  Top Layer w0.305: v2(78.925,53.4) 78.93,53.395 U8.E14@78.93,52.898
  Top Layer w0.381: U8.K13@82.319,55.256 82.319,55.644 v2(82.325,55.65) ; U8.F9@82.329,50.624 v2(82.725,50.625) ; U8.D7@82.406,48.356 v2@82.944,48.356 ; v2@83.129,48.354 U8.E6@83.509,48.354 ; U8.P14@84.106,57.981 84.569,57.981 v2(84.575,57.975) ; v2(86.375,55.15) 86.39,55.165 86.79,55.165 U8.P9@86.794,55.169 ; v2(87.975,52.35) U8.N6@87.975,52.887
  Top Layer w0.406: C19.1@55.4,51.2 55.57,51.03 56.245,51.03 56.325,50.95 v1(56.35,50.95)
  MidLayer2SIG w0.2: v2(78.375,50.625) 78.375,49.775 80.245,47.905 ; v2@82.95,48.275 v2@83.025,48.275 ; v2@86.325,55.1 v2@86.4,55.1 ; v2@86.369,55.156 v2(86.375,55.15)
  MidLayer2SIG w0.203: 82.053,48.125 82.186,48.257 ; 82.704,48.257 82.748,48.301 82.901,48.301 v2(82.95,48.35) ; v2@82.725,50.556 v2(82.725,50.625)
  MidLayer2SIG w0.406: v1(56.1,45.65) 57.95,45.65 58.475,46.175 58.475,46.75 57.1,48.125 55.6,48.125 55.05,48.675 55.05,50.712 55.288,50.95 v1(56.35,50.95) ; v2(79.775,45.925) 79.775,45.939 80.245,46.409 80.245,47.905
  Bottom Layer w0.169: v1(56.1,45.65) R13.2@56.825,45.65
  Bottom Layer w0.2: U9.5@75.1,46.28 75.1,45.866 75.457,45.509 76.548,45.509 76.964,45.925 v2(79.775,45.925) ; C50.1@78.65,49.775 C50.1@78.65,49.9
  Bottom Layer w0.203: v2@82.676,50.576 v2(82.725,50.625) ; C46.1@86.051,54.784 86.051,54.792 86.375,55.115 v2(86.375,55.15)
  Bottom Layer w0.254: C44.1@82.424,50.966 82.424,50.963 82.7,50.687 v2@82.7,50.675
  Bottom Layer w0.279: v2@78.925,53.45 78.941,53.434 79.092,53.434 79.313,53.656 79.334,53.656 C49.1@79.349,53.641 ; v2(82.325,55.65) 82.373,55.65 82.673,55.95 C47.1@82.7,55.95 ; v2@83,48.35 83.216,48.35 C45.1@83.349,48.482 ; C48.1@84.205,57.249 84.55,57.594 v2@84.55,57.875
  Bottom Layer w0.406: v2(78.375,50.625) 78.375,50.175 C50.1@78.65,49.9
LDO_3V3: C16.1 C68.1 C69.1 C70.1 C71.1 C72.1 C73.1 C74.1 C75.1 C76.1 C77.1 C78.1 C79.1 C80.1 R6.2 R10.2 R12.2 R14.2 R16.2 R17.2 R18.2 R19.2 R20.2 R21.2 R22.2 R23.2 R24.2 R25.2 R26.2 R27.2 R28.2 R29.2 R30.2 R31.2 R160.2 R161.2 U4.43 U6.5 U7.5 U8.E10 U8.E11 U8.E12 U8.E13 U8.F14 U8.G14 U8.H14 U8.J14 U8.K14 U8.L14 U8.N5 U8.N15 U8.P5 U8.P6 U8.P7 U8.P8 U8.P10 U8.P11 U8.P12 U8.P13 U8.R15 | length 123
  Top Layer w0.203: 59.975,53.6 60.27,53.305 U4.43@60.27,52.784
  Top Layer w0.254: U6.5@48.529,69.173 48.539,69.184 48.539,70.089 v1(48.55,70.1) ; U8.F14@79.501,53.453 U8.F14@79.503,53.45 ; U8.G14@80.066,54.018 U8.G14@80.071,54.014
  Top Layer w0.305: U8.K14@81.786,55.741 81.791,55.746 81.791,56.125 81.85,56.184 v2(81.85,56.225) 81.878,56.253 82.324,56.253 U8.L14@82.326,56.251
  Top Layer w0.381: U8.E13@79.501,52.321 79.511,52.311 80.014,52.311 v2(80.025,52.3) 80.025,52.279 80.053,52.251 80.053,51.769 U8.E12@80.066,51.756 ; U8.F14@79.503,53.45 v2(80.075,53.45) ; v2@80.071,53.454 U8.G14@80.071,54.014 ; U8.E11@80.632,51.19 80.639,51.182 81.093,51.182 v2(81.1,51.175) 81.1,51.154 81.15,51.104 81.15,50.656 U8.E10@81.103,50.61 ; U8.H14@80.632,54.584 80.645,54.597 80.694,54.597 80.701,54.604 80.801,54.604 80.825,54.627 81.152,54.627 v2(81.175,54.65) ; v2@81.181,54.79 U8.J14@81.181,55.178 ; U8.N15@82.96,57.965 83.285,57.965 v2(83.3,57.95) ; v2@84.006,58.569 U8.R15@84.006,59.019 ; U8.P13@84.569,57.419 84.605,57.382 84.605,56.916 84.625,56.896 v2(84.625,56.875) 84.646,56.875 84.661,56.86 85.126,56.86 85.133,56.853 U8.P12@85.133,56.851 ; U8.P11@85.725,56.287 v2(85.725,55.775) 85.746,55.775 85.792,55.729 86.28,55.729 U8.P10@86.283,55.726 ; U8.P8@87.444,54.594 87.433,54.583 87.433,54.162 87.5,54.096 v2(87.5,54.075) 87.521,54.075 87.564,54.032 88.002,54.032 U8.P7@88.008,54.026 ; U8.P7@87.986,54.018 87.999,54.005 87.999,53.476 v2@88.025,53.45 ; v2@88.019,53.494 U8.P6@88.469,53.494 ; v2@88.55,52.875 88.56,52.865 88.56,52.33 U8.N5@88.552,52.321 ; v2(88.569,52.897) U8.P6@88.569,53.469 ; v2@88.573,52.901 U8.P5@89.075,52.901 ; v1@103.364,46.319 R31.2@103.638,46.593 ; v1(104.05,45.375) 104.082,45.375 104.475,45.768 R27.2@104.513,45.768 ; v1@105.064,44.619 R23.2@105.338,44.893 ; v1@105.939,43.769 R19.2@106.213,44.043 ; v1@106.764,42.894 R22.2@107.038,43.168 ; v1@107.639,42.044 R18.2@107.913,42.318 ; v1@108.514,41.169 R21.2@108.788,41.443 ; v1@109.339,40.319 R17.2@109.613,40.593 ; v1@110.239,39.469 R20.2@110.513,39.743 ; v1(128.225,57.45) 128.238,57.463 128.238,58.338 U7.5@128.25,58.35
  Top Layer w0.406: 59.975,53.6 v1(59.975,53.95)
  MidLayer2SIG w0.203: v2@88.616,52.85 v2@88.7,52.85
  MidLayer2SIG w0.381: 88.583,53.983 89.1,54.5 91.225,54.5 ; v1@103.25,46.225 v1@103.272,46.225
  MidLayer2SIG w0.508: 91.325,54.5 97.75,54.5 102.125,50.125 102.125,47.359 v1(103.26,46.224) ; v1@103.272,46.225 v1@110.123,39.374 ; v1@110.075,39.375 113.875,39.375 128.225,53.725 v1(128.225,57.45)
  Bottom Layer w0.203: v2@81.9,56.275 v2@81.9,56.309 ; v2(85.725,55.775) v2@85.725,55.844 ; v2@88,53.406 v2(88,53.475)
  Bottom Layer w0.208: v2@80.1,53.425 v2@80.1,53.534 ; C69.1@80.349,53.841 80.363,53.827 C69.1@80.363,53.797
  Bottom Layer w0.254: v1(48.55,70.1) 50.55,68.1 52.8,68.1 55.05,65.85 55.05,57.85 57.818,55.082 58.745,55.082 C16.1@58.925,54.902 ; R12.2@65.85,53.425 R12.2@65.875,53.4 ; R14.2@65.875,52.125 R14.2@65.9,52.1
  Bottom Layer w0.279: v2@80.1,53.534 C69.1@80.363,53.797 ; v2@81.25,54.625 81.25,54.691 81.53,54.971 81.551,54.971 C71.1@81.557,54.964 ; v2(81.85,56.225) C68.1@82.15,56.525 ; v2@83.375,57.9 83.533,57.9 83.784,57.649 C80.1@83.805,57.649 ; v2@84.125,58.5 84.314,58.5 C79.1@84.619,58.806 ; v2(84.625,56.875) 84.659,56.841 84.769,56.841 C78.1@85.001,56.609 ; C78.1@85.1,56.525 85.1,56.506 85.376,56.23 C77.1@85.376,56.209 ; C77.1@85.45,56.125 85.45,56.098 85.725,55.823 v2(85.725,55.775) ; C75.1@87.805,53.003 C75.1@87.82,52.989
  Bottom Layer w0.305: R160.2@63.075,48.525 R161.2@63.075,49.55 63.075,50.2 64.3,51.425 65.225,51.425 R14.2@65.727,51.927
  Bottom Layer w0.356: R14.2@65.875,52.125 R12.2@65.875,53.4
  Bottom Layer w0.381: v2@87.5,54.054 v2(87.5,54.075) ; v1(103.26,46.224) 103.26,46.23 103.631,46.6 R26.2@103.7,46.6 ; v1(104.05,45.375) 104.075,45.375 104.475,45.775 R25.2@104.5,45.775 ; v1@104.975,44.55 104.993,44.55 105.34,44.896 R30.2@105.346,44.896 ; v1(105.835,43.674) R29.2@106.221,44.06 ; v1@106.675,42.8 106.676,42.8 107.041,43.165 R28.2@107.056,43.165 ; v1@107.569,41.975 107.941,42.347 R24.2@107.949,42.347 ; v1@108.41,41.109 R16.2@108.793,41.492
  Bottom Layer w0.406: R6.2@48.55,71.325 48.55,70.125 v1@48.575,70.1 ; C16.1@58.986,54.914 58.986,54.289 59.325,53.95 v1(59.975,53.95) 59.975,53.05 60.275,52.75 65.775,52.75
  Bottom Layer w0.508: R10.2@128.25,56.375 v1@128.25,57.425
  other v1: 110.135,39.374 109.235,40.224 108.41,41.074 107.535,41.949 106.66,42.799 104.96,44.524
  other v2: 84.025,58.55
LDO_POWER_LED: C18.1 R3.2 U4.1 | length 36
  Top Layer w0.203: R3.2@33.35,36.85 33.375,36.825 34.325,36.825 34.7,37.2 34.7,38 34.975,38.275 C18.1@35.9,38.275 38.725,38.275 39.375,38.925 42.425,38.925 43.925,40.425 48.175,40.425 50.25,42.5 50.25,50.825 51.65,52.225 53.029,52.225 53.036,52.218 56.709,52.218 56.891,52.036 57.519,52.036 U4.1@57.52,52.034
LTE_ANT: R97.2 U19.60 | length 1.8
  Top Layer w0.167: U19.60@130.625,77.205 132.37,77.205 R97.2@132.425,77.15
LTE_ANT_CON: D1.1 J4.1 R95.1 | length 7.9
  Top Layer w0.167: R95.1@143.025,77.225 143.045,77.205 J4.1@150.95,77.205
LTE_ANT_MATCH: C138.1 R96.2 R97.1 | length 3.4
  Top Layer w0.167: R97.1@133.256,77.205 136.558,77.205 136.65,77.297 R96.2@136.65,77.3
LTE_ANT_MATCH_OUT: C137.1 R95.2 R96.1 | length 4.2
  Top Layer w0.167: R96.1@137.875,77.225 142.011,77.225 R95.2@142.031,77.205
LTE_NETLIGHT: R101.1 R103.1 U19.52 | length 11.9
  Top Layer w0.169: U19.52@130.625,69.205 131.42,69.205 v1@131.925,68.7
  Bottom Layer w0.152: v1@132.05,68.65 132.039,68.639 132.039,68.636 133.975,66.7 R103.1@139.934,66.7 ; R103.1@139.934,66.725 R101.1@141.584,66.725
  other v1: 131.925,68.75
LTE_NETLIGHT_DRAIN: LED2.2 U22.3 | length 6.7
  Top Layer w0.203: v1(149.475,67.975) 150.862,67.975 LED2.2@151.025,68.138
  Bottom Layer w0.203: U22.3@144.412,67.998 144.435,67.975 v1(149.475,67.975)
LTE_NETLIGHT_GATE: R101.2 U22.1 | length 5.6
  Bottom Layer w0.152: 144.925,64.175 144.937,64.163 ; U22.1@145.325,65.1 U22.1@145.362,65.063
  Bottom Layer w0.203: R101.2@141.584,65.475 141.584,64.441 141.85,64.175 144.925,64.175 ; 144.937,64.163 145.362,64.588 U22.1@145.362,65.063
LTE_NETLIGHT_LED: LED2.1 R98.2 | length 11
  Top Layer w0.203: v1(149.7,70) 151.05,70 LED2.1@151.1,69.95
  Bottom Layer w0.203: R98.2@141.725,73.85 145.85,73.85 v1(149.7,70)
LTE_PWRKEY: U19.1 U20.3 | length 35.6
  Top Layer w0.254: U20.3@99.803,80.298 103.448,80.298 106.725,83.575 106.725,87.725 109.5,90.5 126.525,90.5 127.225,89.8 U19.1@127.225,88.605
LTE_PWRKEY_CNTRL: R100.1 U8.U17 U20.1 | length 27.5
  Top Layer w0.152: U8.U17@84.026,61.372 84.027,61.374 84.524,61.374 v2(84.525,61.375)
  Top Layer w0.2: v2(94.525,63.575) 98.825,67.875 98.825,75.675 R100.1@98.975,75.825 98.853,75.947 U20.1@98.853,77.788
  MidLayer2SIG w0.2: v2(84.525,61.375) 85.225,62.075 93.025,62.075 v2(94.525,63.575)
LTE_SIM_CLK: C142.1 D2.4 R106.2 U19.32 | length 34.1
  Top Layer w0.152: v1(102.45,70.9) 103.158,70.9 C142.1@103.17,70.913 ; C142.1@103.1,70.85 C142.1@103.125,70.875
  Top Layer w0.203: C142.1@103.1,70.85 103.1,70.35 103.25,70.2 104.75,70.2 105.755,71.205 U19.32@107.825,71.205
  Bottom Layer w0.152: v1@102.425,70.925 102.475,70.925 102.975,71.425 105.675,71.425 106.55,72.3 108.35,72.3 ; 108.25,72.3 108.35,72.3 ; D2.4@111.925,69.325 112.106,69.325 112.175,69.256 112.175,68.725 112.275,68.625 118.225,68.625 122,72.4 R106.2@122,73.225 ; D2.4@112.166,69.475 112.176,69.485 112.91,69.485 113.1,69.675 113.1,71.65 112.45,72.3 108.35,72.3
LTE_SIM_DATA: C143.1 D2.5 R107.2 U19.31 | length 36.7
  Top Layer w0.152: v1(101.725,71.75) 101.819,71.75 102.1,72.031 102.931,72.031 103.145,72.245 C143.1@103.145,72.275
  Top Layer w0.203: C143.1@103.145,72.275 103.145,71.714 103.234,71.625 105.075,71.625 105.655,72.205 U19.31@107.825,72.205
  Bottom Layer w0.152: v1(101.725,71.75) 101.725,70.6 102.175,70.15 110.3,70.15 110.35,70.2 ; D2.5@112.1,70.475 112.075,70.45 110.65,70.45 110.575,70.45 110.3,70.175 110.3,68.8 110.975,68.125 119.7,68.125 123.25,71.675 R107.2@123.25,73.225
LTE_SIM_RST: C141.1 D2.3 R105.2 U19.33 | length 34.9
  Top Layer w0.152: v1@102.55,69.55 C141.1@103.17,69.55
  Top Layer w0.203: C141.1@103.15,69.3 103.15,69.025 103.3,68.875 104.95,68.875 105.5,69.425 105.5,69.8 105.9,70.2 U19.33@107.9,70.2
  Bottom Layer w0.152: v1@102.5,69.5 102.45,69.55 101.275,69.55 100.575,70.25 100.575,71.575 101.203,72.203 102.497,72.203 103,71.7 105.425,71.7 106.5,72.775 112.575,72.775 113.4,71.95 113.4,69.75 113.675,69.475 D2.3@114.676,69.475 117.2,69.475 119.399,71.674 119.399,73.051 119.523,73.175 R105.2@119.525,73.175
  other v1: 102.5,69.55
LTE_STATUS: R102.2 R104.2 U19.66 | length 30.6
  Top Layer w0.203: U19.66@130.625,83.205 130.655,83.175 v1@132.225,83.175
  Bottom Layer w0.152: R104.2@140.175,61.3 R102.2@141.825,61.3
  Bottom Layer w0.203: v1(132.225,83.15) 132.225,80.2 130.625,78.6 130.625,68.95 138.3,61.275 R104.2@139.95,61.275
LTE_STATUS_DRAIN: LED3.2 U21.3 | length 6.7
  Top Layer w0.152: LED3.2@150.943,62.575 LED3.2@151.025,62.657
  Top Layer w0.203: v1(149.45,62.45) 150.818,62.45 LED3.2@150.943,62.575
  Bottom Layer w0.203: U21.3@144.403,62.548 144.501,62.45 v1(149.45,62.45)
LTE_STATUS_GATE: R102.1 U21.1 | length 6.2
  Bottom Layer w0.203: R102.1@141.825,60.05 141.825,58.975 142.225,58.575 145.1,58.575 145.4,58.875 U21.1@145.4,60.15
LTE_STATUS_LED: LED3.1 R99.2 | length 15.6
  Top Layer w0.203: v1(149.7,64.475) 150.857,64.475 LED3.1@151.025,64.307
  Bottom Layer w0.203: R99.2@141.725,72.475 146.025,72.475 150.15,68.35 150.15,65.35 149.7,64.9 v1(149.7,64.475)
MMC0_CLK: R87.1 R133.2 U15.5 | length 20.6
  Bottom Layer w0.169: U15.5@61.5,28.275 61.5,29.5 61.5,29.62 61.16,29.96 61.16,30.11 61.31,30.259 61.459,30.259 61.622,30.097 61.772,30.097 61.9,30.225 62.175,30.5 65.275,30.5 70.467,35.692 71.67,35.692 73.4,37.422 73.4,38.801 73.499,38.9 R87.1@73.904,38.9 ; R87.1@73.925,38.9 R133.2@73.925,40.175
MMC0_CLK_R: R133.1 U8.G17 | length 24.1
  Top Layer w0.169: v2(70.2,54.65) 70.2,54.665 71.91,56.375 77.146,56.375 77.806,55.715 U8.G17@78.369,55.715
  Bottom Layer w0.169: v2(70.2,54.65) 70.825,54.025 70.825,45.125 73.8,42.15 73.8,41.3 R133.1@73.9,41.2
MMC0_CMD: R86.1 R130.2 U15.3 | length 20.7
  Bottom Layer w0.169: U15.3@59.3,28.275 59.3,29.825 60.525,31.05 65.2,31.05 70.275,36.125 70.603,36.125 71.875,37.397 71.875,38.801 71.974,38.9 R86.1@72.608,38.9 ; R130.2@72.525,40.175 72.525,39.025 R86.1@72.575,38.975
MMC0_CMD_R: R130.1 U8.G18 | length 24.2
  Top Layer w0.169: v2(69.575,54.675) 70.578,55.678 70.578,55.803 71.525,56.75 77.259,56.75 77.728,56.281 U8.G18@77.804,56.281
  Bottom Layer w0.169: v2(69.575,54.675) 69.575,54.597 69.815,54.357 69.815,53.793 69.688,53.666 69.688,45.137 72.525,42.3 R130.1@72.525,41.175
MMC0_DAT0: R82.1 R122.2 U15.7 | length 21.6
  Bottom Layer w0.169: U15.7@63.7,28.275 63.7,29.725 64.05,30.075 65.5,30.075 70.575,35.15 72.6,35.15 72.8,35.35 72.86,35.41 72.86,35.56 72.616,35.803 72.616,35.953 72.766,36.102 72.916,36.102 73.459,35.559 73.609,35.559 73.759,35.708 73.759,35.858 73.218,36.398 73.218,36.548 73.368,36.698 73.518,36.698 73.758,36.457 73.907,36.457 74.062,36.612 74.65,37.2 74.65,38.801 74.749,38.9 75.275,38.9 R122.2@75.275,40.175
MMC0_DAT0_R: R122.1 U8.G16 | length 23.1
  Top Layer w0.169: v2(78.925,54.6) 78.93,54.605 78.93,55.145 U8.G16@78.935,55.15
  Bottom Layer w0.169: R122.1@75.275,41.375 75.275,41.95 71.25,45.975 71.25,54.25 71.85,54.85 78.675,54.85 v2(78.925,54.6)
MMC0_DAT1: R83.1 R124.2 U15.8 | length 20.6
  Bottom Layer w0.169: U15.8@64.8,28.275 64.8,29.425 65.025,29.65 65.512,29.65 65.8,29.65 66.121,29.971 66.271,29.971 66.538,29.704 66.687,29.704 66.837,29.854 66.837,30.004 66.48,30.36 66.48,30.51 66.63,30.66 66.78,30.66 66.973,30.466 67.123,30.466 67.272,30.616 67.272,30.766 67.169,30.869 67.169,31.019 67.469,31.319 70.8,34.65 73.475,34.65 75.925,37.1 75.925,38.575 76.175,38.825 76.5,38.825 R83.1@76.55,38.875 ; R83.1@76.55,38.9 76.55,40.15 R124.2@76.575,40.175
MMC0_DAT1_R: R124.1 U8.G15 | length 24.1
  Top Layer w0.169: U8.G15@79.517,54.592 79.967,54.592 v2(79.975,54.6)
  Bottom Layer w0.169: R124.1@76.55,41.2 76.495,41.255 76.495,41.58 71.675,46.4 71.675,53.975 72.2,54.5 78.402,54.5 78.743,54.16 79.15,54.16 79.535,54.545 79.92,54.545 v2(79.975,54.6)
MMC0_DAT2: R84.1 R126.2 U15.1 | length 22.3
  Bottom Layer w0.169: U15.1@57.1,28.275 57.1,29.275 57.1,29.395 56.418,30.077 56.418,30.226 56.568,30.376 56.717,30.376 57.097,29.997 57.247,29.997 57.387,30.137 59.425,32.175 65.175,32.175 69.1,36.1 69.1,38.725 69.275,38.9 R84.1@69.775,38.9 69.8,38.925 R126.2@69.8,40.15